# EAGLE board Circuit v2 (EAGLE 5.11)
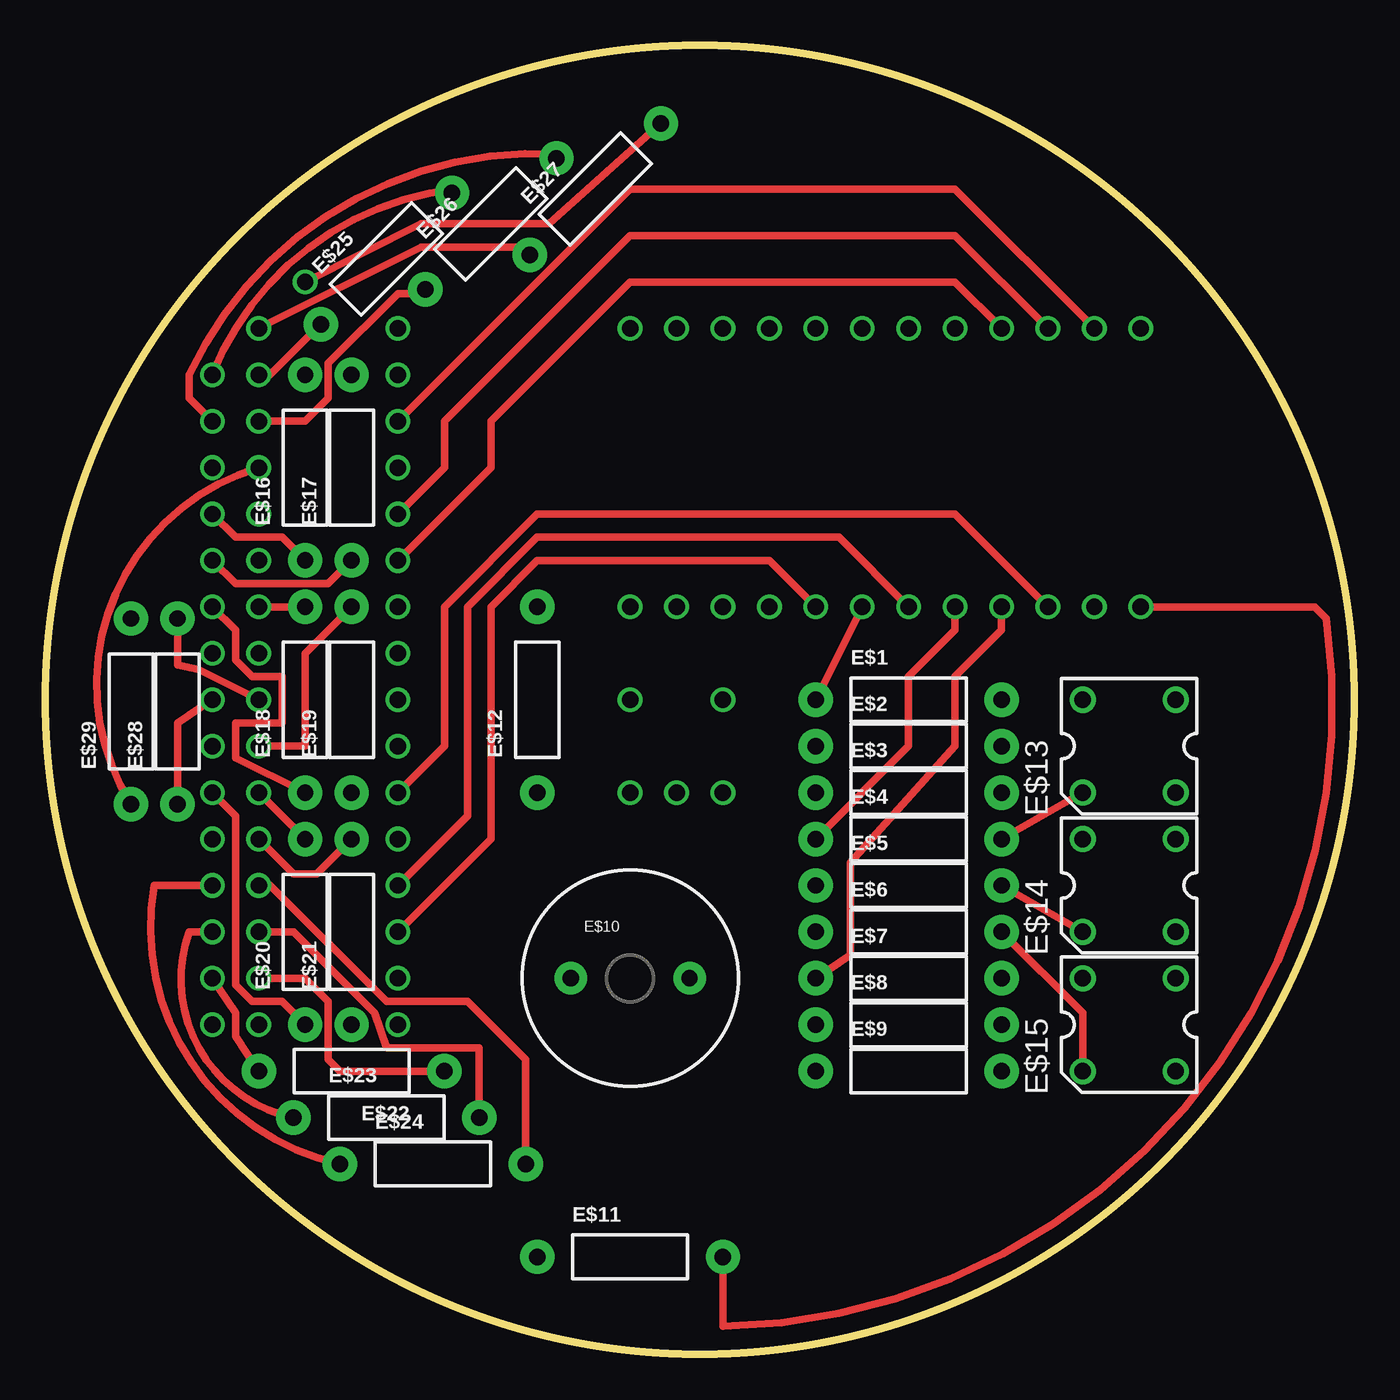
[diagram p0: board, top side]
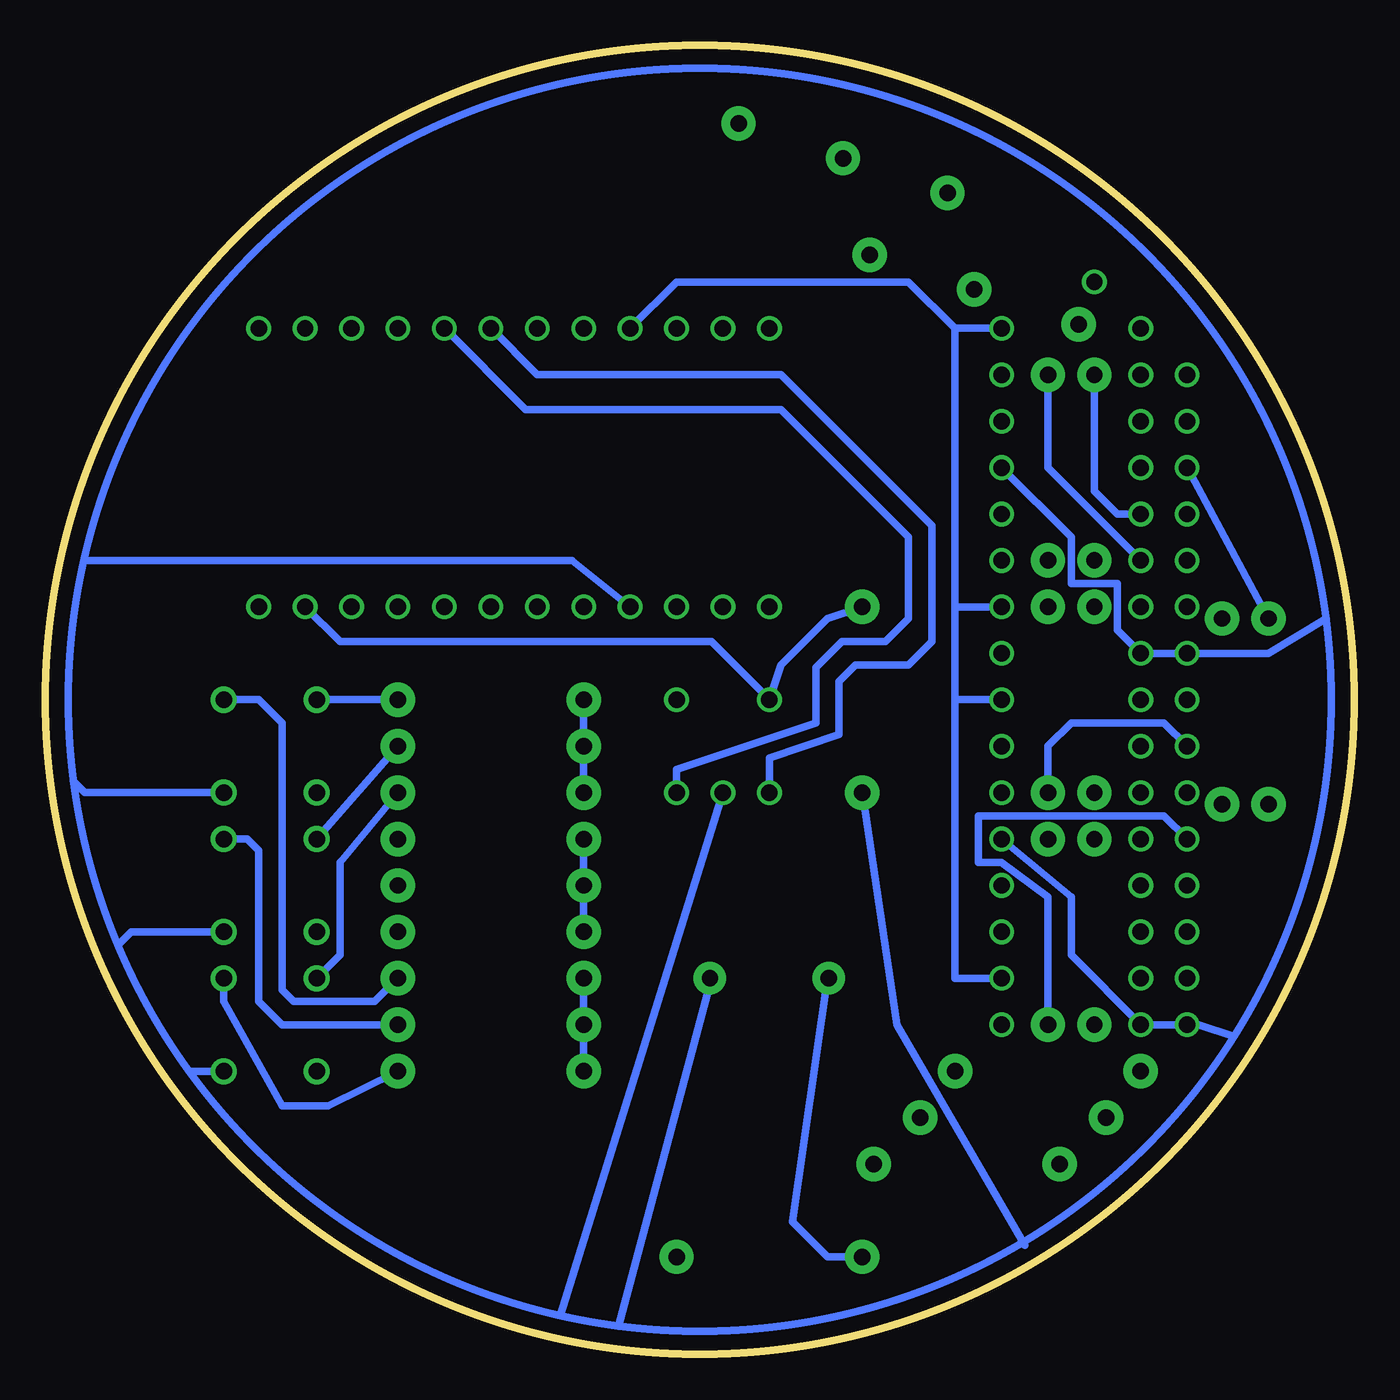
[diagram p1: board, bottom side, seen from below]

Size 71.57 x 71.57 mm. Coordinates in mm from the lower left corner, seen from the top.
Outline: circle at 35.79,35.79 radius 35.79
Copper layers (1*16): Top 0.035mm / dielectric 1.5mm / Bottom 0.035mm
Design rules "default": minimum track width 10mil, minimum drill 24mil, track to track 8mil, track to pad 8mil, pad to pad 8mil, via to via 8mil, smd to smd 8mil, copper to edge 40mil, drill to drill 8mil, minimum pad ring 10mil, minimum via ring 8mil, stop-mask expansion 4mil, vias tented up to drill 0mil, thermal gap 10mil

## Footprints (pad centres in the part's own frame; a part is rotated, then mirrored left to right if it is on the bottom)
AXIAL-0.4 = drill 0.9 pad 1.88 round: P$1 -5.08,0; P$2 5.08,0
BUZZER-12MM = drill 0.9 pad 1.778 round: + 3.25,0; - -3.25,0
SUPERFLUX-7.6X7.6 = drill 0.9 pad 1.422 round: 1 -2.54,2.54; 2 2.54,2.54; 3 -2.54,-2.54; 4 2.54,-2.54

## Placement (x,y rotation side)
E$1  [AXIAL-0.4]  47.22,35.79 0 top
E$2  [AXIAL-0.4]  47.22,33.25 0 top
E$3  [AXIAL-0.4]  47.22,30.71 0 top
E$4  [AXIAL-0.4]  47.22,28.17 0 top
E$5  [AXIAL-0.4]  47.22,25.63 0 top
E$6  [AXIAL-0.4]  47.22,23.09 0 top
E$7  [AXIAL-0.4]  47.22,20.55 0 top
E$8  [AXIAL-0.4]  47.22,18.01 0 top
E$9  [AXIAL-0.4]  47.22,15.47 0 top
E$10  [BUZZER-12MM]  31.98,20.55 0 top
E$11  [AXIAL-0.4]  31.98,5.31 0 top
E$12  [AXIAL-0.4]  26.9,35.79 90 top
E$13  [SUPERFLUX-7.6X7.6]  59.28,33.25 0 top
E$14  [SUPERFLUX-7.6X7.6]  59.28,25.63 0 top
E$15  [SUPERFLUX-7.6X7.6]  59.28,18.01 0 top
E$16  [AXIAL-0.4]  14.2,48.49 90 top
E$17  [AXIAL-0.4]  16.74,48.49 90 top
E$18  [AXIAL-0.4]  14.2,35.79 90 top
E$19  [AXIAL-0.4]  16.74,35.79 90 top
E$20  [AXIAL-0.4]  14.2,23.09 90 top
E$21  [AXIAL-0.4]  16.74,23.09 90 top
E$22  [AXIAL-0.4]  16.74,15.47 180 top
E$23  [AXIAL-0.4]  18.64,12.93 0 top
E$24  [AXIAL-0.4]  21.18,10.39 0 top
E$25  [AXIAL-0.4]  18.64,59.92 45 top
E$26  [AXIAL-0.4]  24.36,61.82 45 top
E$27  [AXIAL-0.4]  30.07,63.73 45 top
E$28  [AXIAL-0.4]  7.21,35.15 90 top
E$29  [AXIAL-0.4]  4.67,35.15 90 top

## Library data of the parts
E$1-E$12 E$16-E$29 = SparkFun
E$13-E$15 = led

## Nets
S$1: E$12.P$2
S$2: E$12.P$1
S$6: E$1.P$2 E$13.1
S$7: E$14.4
S$8: E$4.P$1 E$6.P$1
S$9: E$13.4
S$11: E$7.P$1 E$9.P$1
S$14: E$11.P$2
S$16: E$4.P$2 E$13.3
S$17: E$5.P$2 E$14.3
S$22: E$29.P$2
S$23: E$16.P$1
S$26: E$18.P$1
S$30: E$2.P$2 E$14.1
S$31: E$7.P$2 E$13.2
S$32: E$29.P$1
S$33: E$6.P$2 E$15.3
S$35: E$8.P$2 E$14.2
S$37: E$19.P$1
S$38: E$3.P$2 E$15.1
S$39: E$9.P$2 E$15.2
S$40: E$15.4
S$41: E$21.P$1
S$46: E$24.P$1
S$48: E$22.P$1
S$50: E$28.P$1
S$54: E$16.P$2
S$55: E$17.P$2
S$56: E$18.P$2
S$60: E$11.P$1
S$62: E$17.P$1
S$63: E$19.P$2
S$64: E$20.P$1
S$65: E$23.P$1
S$66: E$22.P$2
S$74: E$28.P$2
S$76: E$20.P$2
S$77: E$21.P$2
S$78: E$24.P$2
S$79: E$23.P$2
S$90: E$1.P$1 E$3.P$1

## Tracks (layer width: path | path; a pad name or v marks a point on that pad's centre or on a via)
S$1  (via drill 0.9)
  Bottom 0.406: E$12.P$2 28.8,40.23 31.34,37.69 v31.98,35.79 35.15,38.96 55.47,38.96 v57.38,40.87
S$2
  Bottom 0.406: E$12.P$1 24.99,18.01 18.01,5.94
S$3  (via drill 0.9)
  Bottom 0.406: v31.98,30.71 31.98,32.61 28.17,33.88 28.17,36.79 27.27,37.69 24.36,37.69 23.09,38.96 23.09,45.31 31.34,53.57 44.68,53.57 v47.22,56.11
S$4  (via drill 0.9)
  Bottom 0.406: v34.52,30.71 43.41,2.13
S$5  (via drill 0.9)
  Bottom 0.406: v37.06,30.71 37.06,31.98 29.44,34.52 29.44,37.54 28.02,38.96 25.63,38.96 24.36,40.23 24.36,44.68 31.34,51.66 45.31,51.66 v49.76,56.11
S$6
  Bottom 0.406: E$1.P$2 E$13.1
S$7
  Bottom 0.406: E$14.4 66.9,23.09 67.54,22.45
S$8  (via drill 0.9)
  Top 0.406: v49.76,40.87 49.76,39.6 47.22,37.06 47.22,33.25 E$4.P$1
  Bottom 0.406: E$6.P$1 E$4.P$1
S$9
  Bottom 0.406: E$13.4 69.44,30.71 70.08,31.34
S$10  (via drill 0.9)
  Top 0.406: 22.45,63.73 arc62 v9.12,53.57
S$11  (via drill 0.9)
  Top 0.406: v52.3,40.87 52.3,39.6 49.76,37.06 49.76,33.25 44.04,26.9 44.04,21.82 E$7.P$1
  Bottom 0.406: E$9.P$1 E$7.P$1
S$12  (via drill 0.9)
  other vias: 37.06,40.87
S$13  (via drill 0.9)
  other vias: 34.52,40.87
S$14  (via drill 0.9)
  Top 0.406: E$11.P$2 37.06,1.5 arc97 70.08,40.23 69.44,40.87 v59.92,40.87
S$15  (via drill 0.9)
  other vias: 31.98,40.87
S$16
  Top 0.406: E$4.P$2 E$13.3
S$17
  Top 0.406: E$14.3 E$5.P$2
S$18  (via drill 0.9)
  other vias: 59.92,56.11
S$19  (via drill 0.9)
  other vias: 37.06,35.79
S$20  (via drill 0.9)
  Top 0.406: v54.84,56.11 49.76,61.19 31.98,61.19 21.82,51.03 21.82,48.49 v19.28,45.95
S$21  (via drill 0.9)
  Top 0.406: v52.3,56.11 49.76,58.65 31.98,58.65 24.36,51.03 24.36,48.49 v19.28,43.41
S$22  (via drill 0.9)
  Bottom 0.406: E$29.P$2 v9.12,48.49
S$23  (via drill 0.9)
  Top 0.406: E$16.P$1 12.93,44.68 10.39,44.68 v9.12,45.95
S$24  (via drill 0.9)
  other vias: 44.68,56.11
S$25  (via drill 0.9)
  other vias: 42.14,56.11
S$26  (via drill 0.9)
  Top 0.406: E$18.P$1 10.39,32.61 10.39,34.52 12.93,34.52 12.93,37.06 11.28,37.06 10.39,37.95 10.39,39.6 v9.12,40.87
S$27  (via drill 0.9)
  other vias: 37.06,56.11
S$28  (via drill 0.9)
  other vias: 31.98,56.11
S$29  (via drill 0.9)
  other vias: 34.52,56.11
S$30
  Bottom 0.406: E$14.1 E$2.P$2
S$31
  Bottom 0.406: E$7.P$2 53.57,19.28 58.01,19.28 58.65,19.91 58.65,34.52 59.92,35.79 E$13.2
S$32  (via drill 0.9)
  Top 0.406: v11.66,48.49 arc106 E$29.P$1
S$33
  Top 0.406: E$15.3 56.74,18.64 E$6.P$2
S$34  (via drill 0.9)
  Top 0.406: v11.66,56.11 20.55,60.55 26.26,60.55
S$35
  Bottom 0.406: E$8.P$2 58.65,18.01 59.92,19.28 59.92,27.53 60.55,28.17 E$14.2
S$36  (via drill 0.9)
  Bottom 0.406: 1.5,40.23 4.67,38.33 v9.12,38.33 v11.66,38.33 12.93,39.6 12.93,42.14 15.47,42.14 15.47,44.68 v19.28,48.49
S$37  (via drill 0.9)
  Bottom 0.406: E$19.P$1 16.74,33.25 15.47,34.52 10.39,34.52 v9.12,33.25
S$38
  Bottom 0.406: E$3.P$2 55.47,26.9 55.47,21.82 E$15.1
S$39
  Bottom 0.406: E$9.P$2 56.11,13.56 58.65,13.56 61.82,19.28 E$15.2
S$40
  Bottom 0.406: E$15.4 63.73,15.47
S$41  (via drill 0.9)
  Bottom 0.406: E$21.P$1 16.74,24.99 19.28,26.9 20.55,26.9 20.55,29.44 10.39,29.44 v9.12,28.17
S$42  (via drill 0.9)
  Bottom 0.406: v19.28,56.11 21.82,56.11 | 21.82,56.11 21.82,40.87 | 21.82,40.87 v19.28,40.87 | 21.82,40.87 21.82,35.79 | 21.82,35.79 v19.28,35.79 | 21.82,35.79 21.82,20.55 v19.28,20.55 | 21.82,56.11 24.36,58.65 37.06,58.65 v39.6,56.11
S$43  (via drill 0.9)
  other vias: 19.28,53.57
S$44  (via drill 0.9)
  Top 0.406: v57.38,56.11 49.76,63.73 31.98,63.73 v19.28,51.03
S$45  (via drill 0.9)
  Top 0.406: 28.17,65.63 arc68 7.85,53.57 7.85,52.3 v9.12,51.03
S$46  (via drill 0.9)
  Top 0.406: E$24.P$1 arc-88 5.94,25.63 v9.12,25.63
S$48  (via drill 0.9)
  Top 0.406: v11.66,20.55 14.2,20.55 15.47,19.28 15.47,16.1 16.1,15.47 E$22.P$1
S$49  (via drill 0.9)
  other vias: 19.28,38.33
S$50  (via drill 0.9)
  Top 0.406: E$28.P$1 7.21,34.52 v9.12,35.79
S$51  (via drill 0.9)
  Top 0.406: v11.66,53.57 12.29,53.57 14.83,56.11
S$52  (via drill 0.9)
  Top 0.406: v11.66,51.03 14.2,51.03 15.47,52.3 15.47,54.2 19.28,58.01 20.55,58.01
S$53  (via drill 0.9)
  Top 0.406: 33.88,67.54 27.53,61.82 20.55,61.82 v14.2,58.65
S$54  (via drill 0.9)
  Bottom 0.406: v11.66,45.95 12.93,45.95 14.2,47.22 E$16.P$2
S$55  (via drill 0.9)
  Bottom 0.406: v11.66,43.41 16.74,48.49 E$17.P$2
S$56  (via drill 0.9)
  Top 0.406: v11.66,40.87 E$18.P$2
S$57  (via drill 0.9)
  Bottom 0.406: 69.44,43.41 42.77,43.41 v39.6,40.87
S$58
  Bottom 0.406: 35.15,20.55 40.23,1.5
S$60
  Bottom 0.406: 28.8,20.55 30.71,7.21 28.8,5.31 E$11.P$1
S$62  (via drill 0.9)
  Top 0.406: E$17.P$1 15.47,42.14 10.39,42.14 v9.12,43.41
S$63  (via drill 0.9)
  Top 0.406: v11.66,33.25 14.2,33.25 14.2,38.33 E$19.P$2
S$64  (via drill 0.9)
  Top 0.406: E$20.P$1 12.93,19.28 11.28,19.28 10.39,20.17 10.39,29.44 v9.12,30.71
S$65  (via drill 0.9)
  Top 0.406: E$23.P$1 arc-98 7.85,23.09 v9.12,23.09
S$66  (via drill 0.9)
  Top 0.406: E$22.P$2 10.39,17.37 10.39,18.64 v9.12,20.55
S$67  (via drill 0.9)
  other vias: 19.28,33.25
S$68  (via drill 0.9)
  Top 0.406: v19.28,30.71 21.82,33.25 21.82,40.87 26.9,45.95 49.76,45.95 v54.84,40.87
S$69  (via drill 0.9)
  Bottom 0.406: v19.28,28.17 15.47,24.99 15.47,21.82 v11.66,18.01 v9.12,18.01 8.48,18.01 6.58,17.37
S$70  (via drill 0.9)
  Top 0.406: v19.28,25.63 23.09,29.44 23.09,40.87 26.9,44.68 43.41,44.68 v47.22,40.87
S$71  (via drill 0.9)
  Top 0.406: v19.28,23.09 24.36,28.17 24.36,40.87 26.9,43.41 39.6,43.41 v42.14,40.87
S$73  (via drill 0.9)
  other vias: 19.28,18.01
S$74  (via drill 0.9)
  Top 0.406: v11.66,35.79 8.37,37.43 7.21,37.69 E$28.P$2
S$76  (via drill 0.9)
  Top 0.406: v11.66,30.71 E$20.P$2
S$77  (via drill 0.9)
  Top 0.406: v11.66,28.17 13.56,26.26 14.83,26.26 E$21.P$2
S$78  (via drill 0.9)
  Top 0.406: v11.66,25.63 12.29,25.63 18.64,19.28 23.09,19.28 26.26,16.1 E$24.P$2
S$79  (via drill 0.9)
  Top 0.406: v11.66,23.09 13.56,23.09 18.01,18.64 18.64,16.74 23.72,16.74 E$23.P$2
S$90  (via drill 0.9)
  Top 0.406: E$1.P$1 v44.68,40.87
  Bottom 0.406: E$3.P$1 E$1.P$1
(copper drawn outside any net)
  shapes: Bottom circle x1